# Altium PCB PCA9685_pcb.PcbDoc
Units mm, origin at the board's own origin, x right, y up, seen from the top; angles counter-clockwise.
Board outline 50.8 x 45.72 mm, 2 copper layers (Top Layer, Bottom Layer); 51 components, 24 nets, 110 pads, 19 vias.
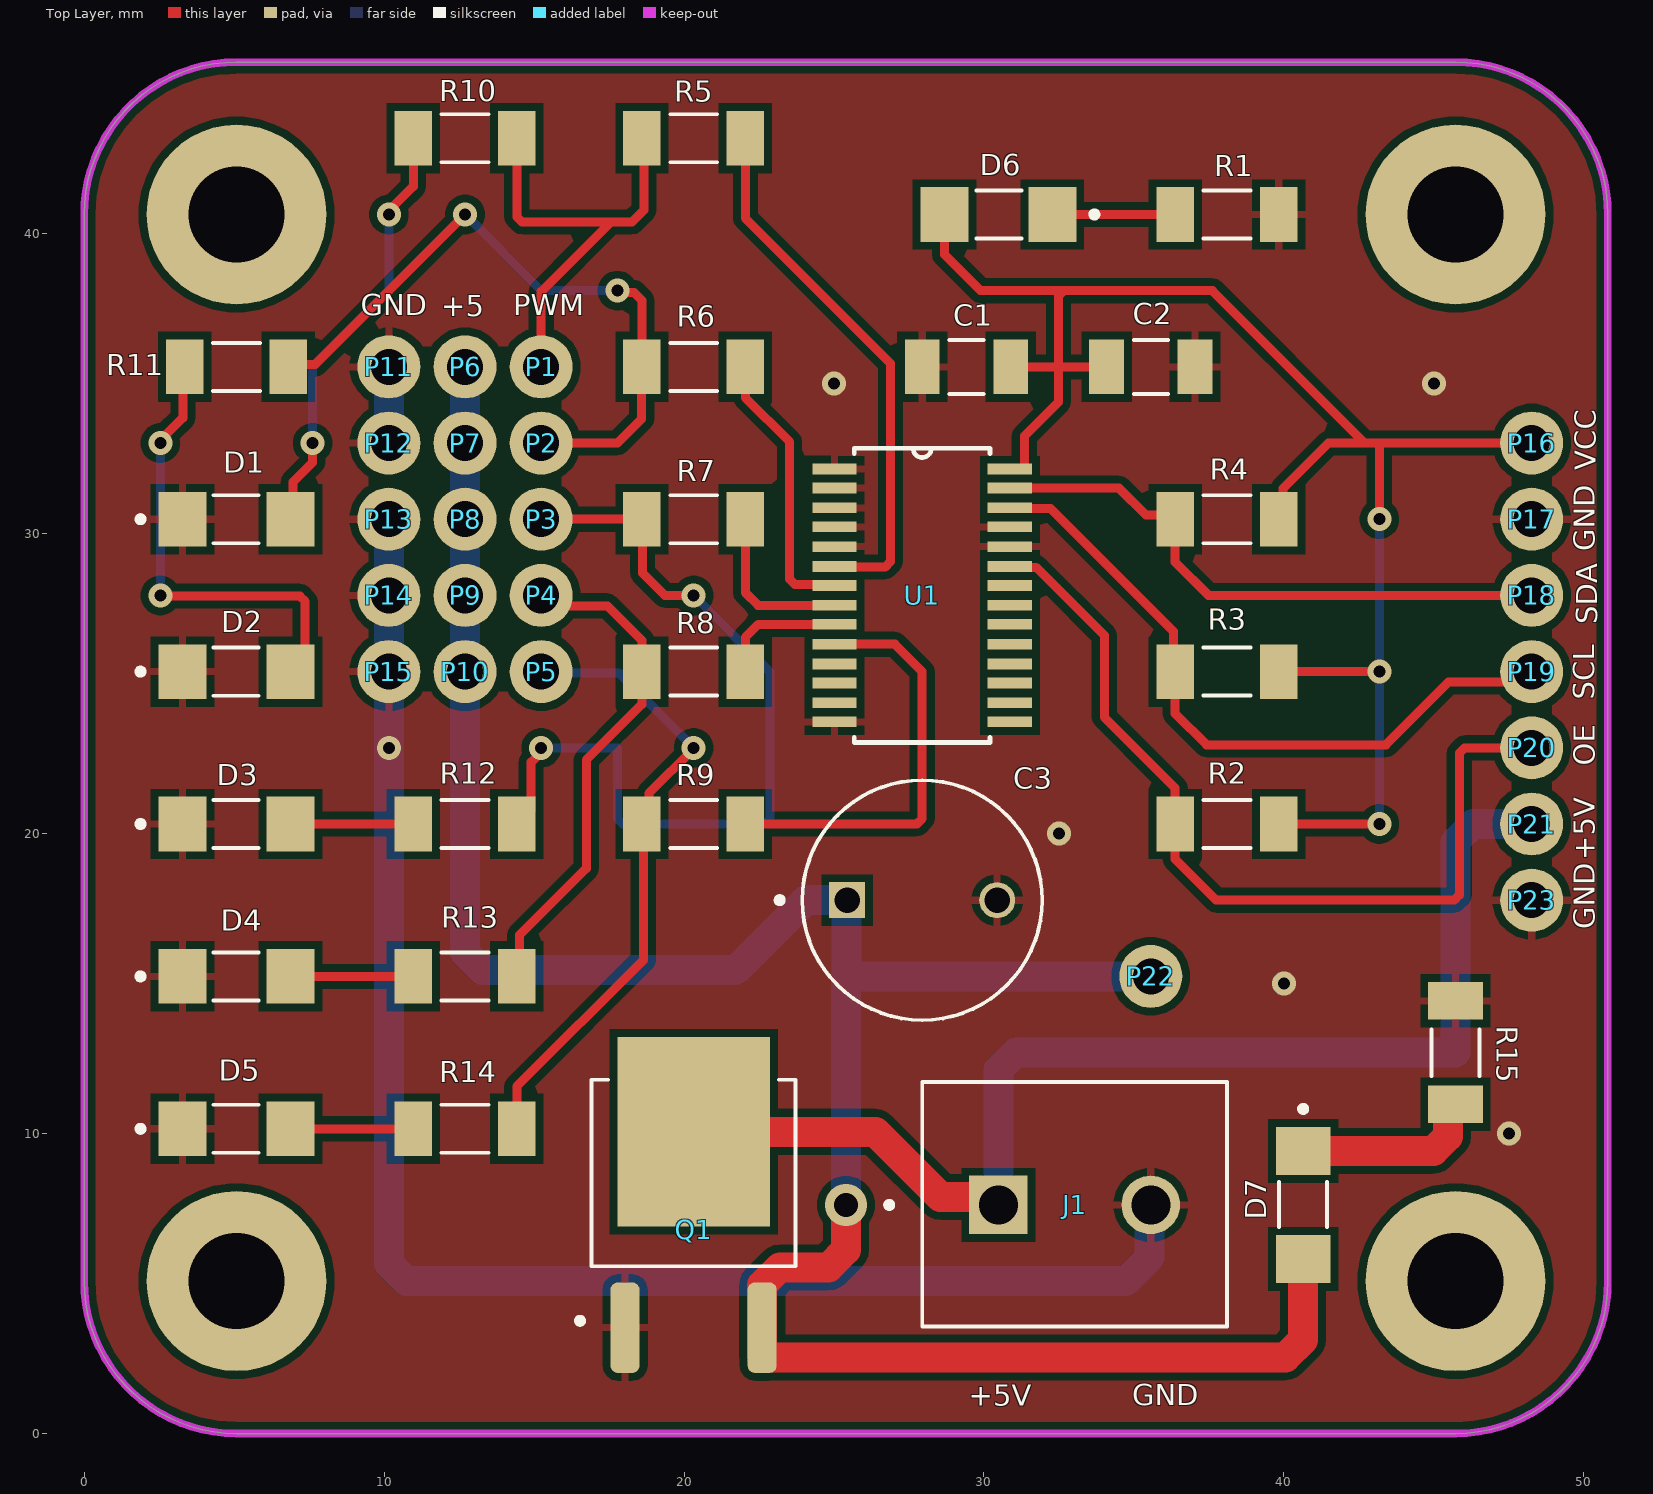
[diagram p0: Top Layer view]
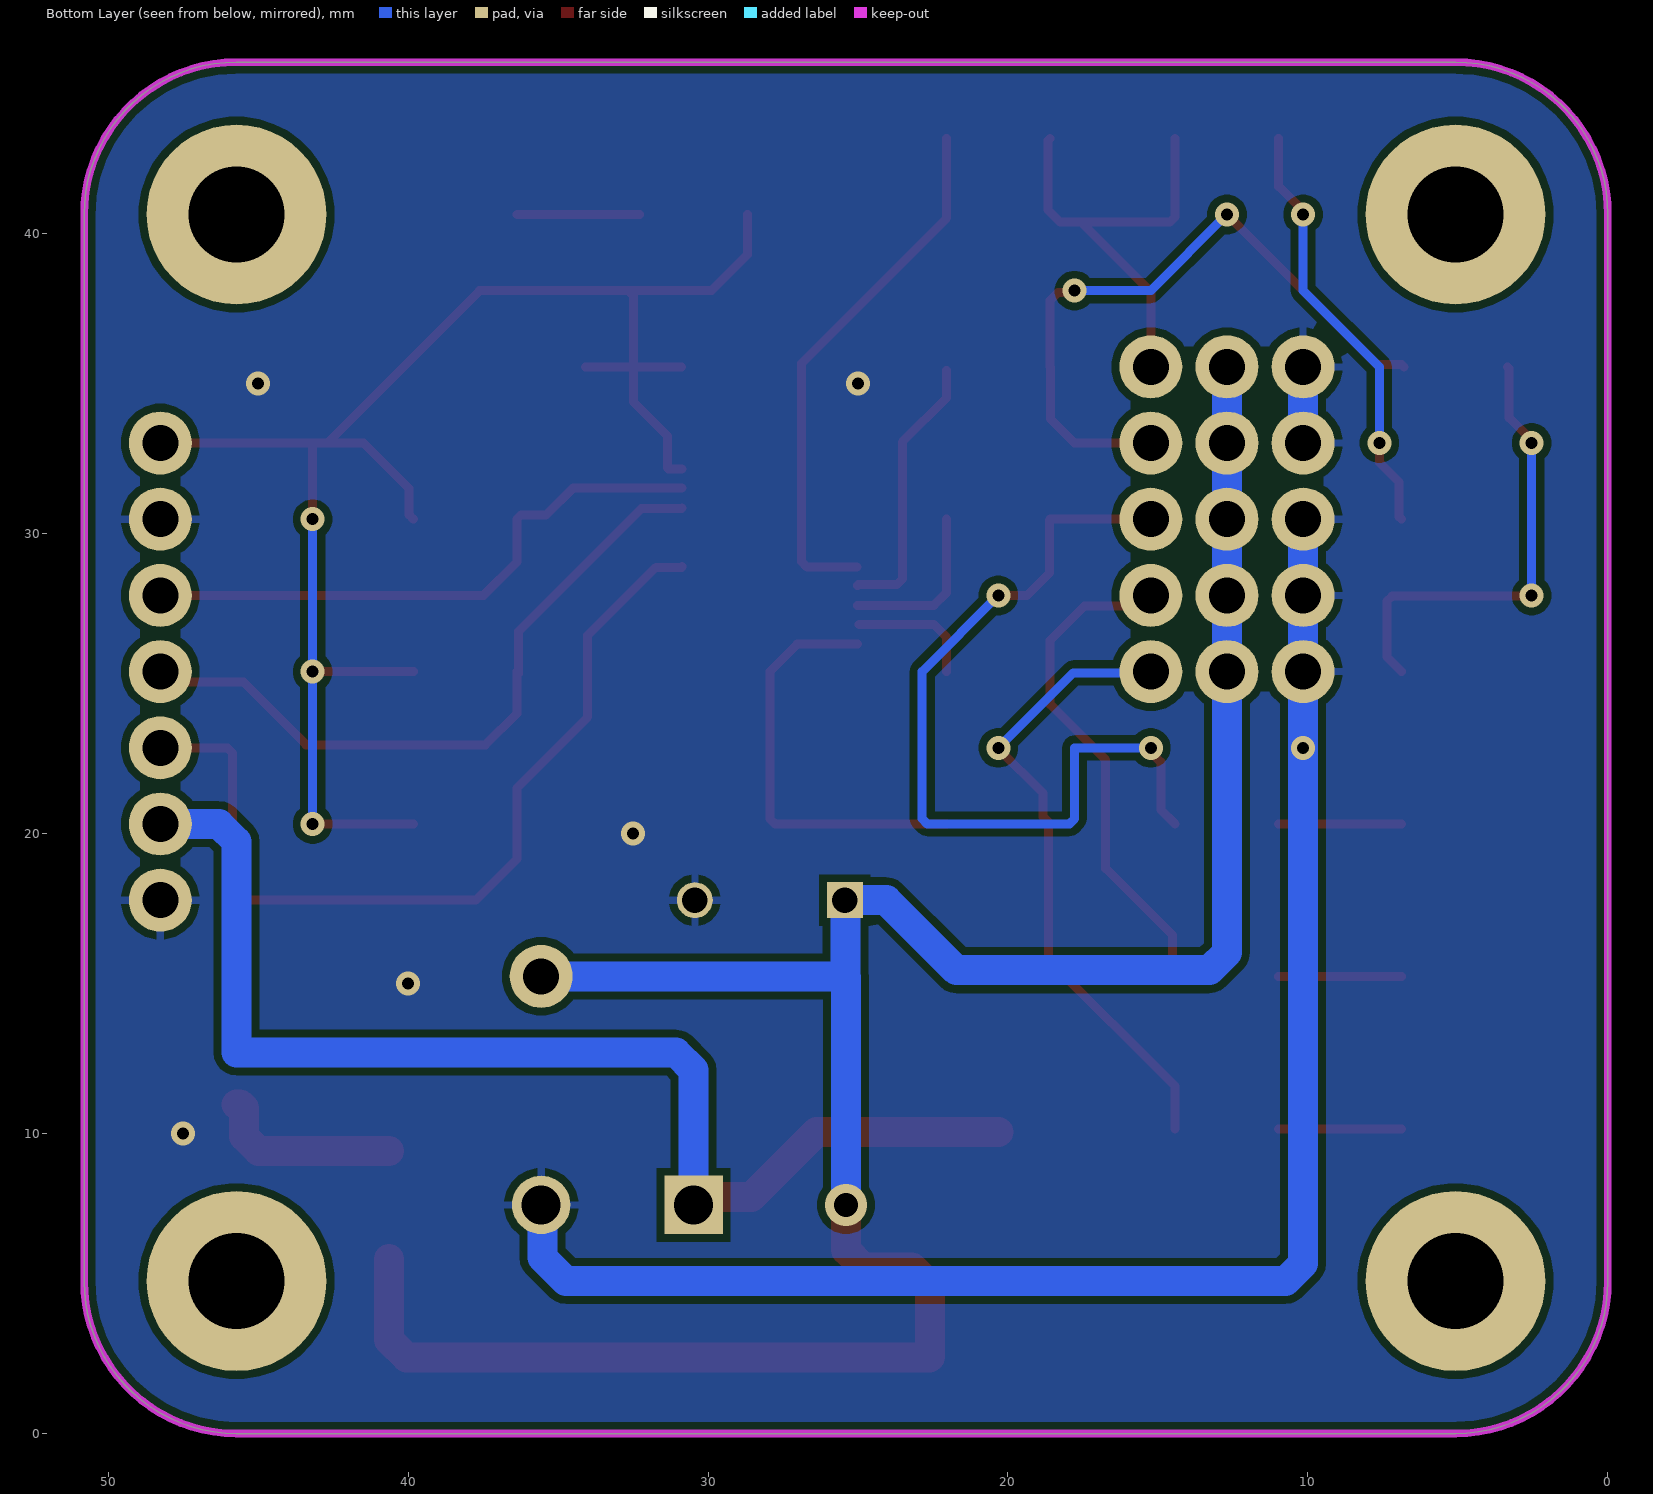
[diagram p1: Bottom Layer view, seen from below]
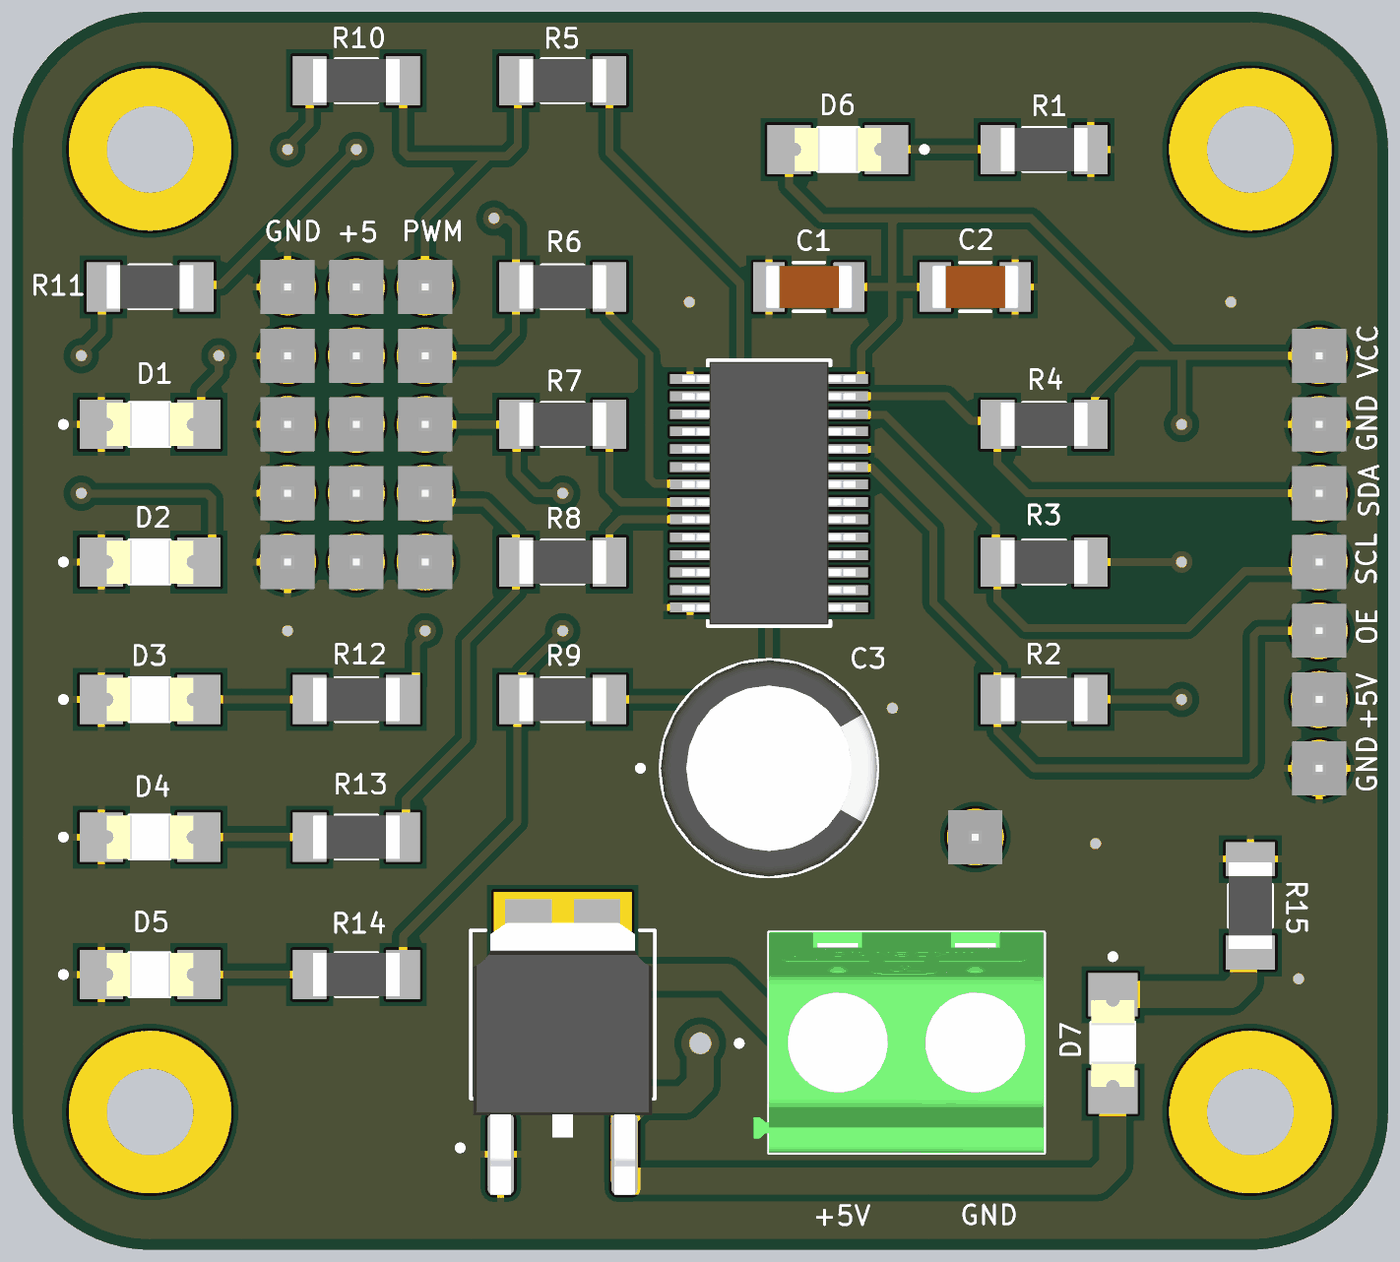
[diagram p2: 3D render of the assembled board from above, using the file's embedded part models]

## Layer stack, top to bottom
Top Solder: solder mask 0.0102, Solder Resist, Dk 3.5
Top Layer: signal copper 0.0356
Dielectric 1: dielectric 0.32, FR-4, Dk 4.8
Bottom Layer: signal copper 0.0356
Bottom Solder: solder mask 0.0102, Solder Resist, Dk 3.5

## Board outline
0,5.08 0,40.64 cw(c5.08,40.64) 5.08,45.72 45.72,45.72 cw(c45.72,40.64) 50.8,40.64 50.8,5.08 cw(c45.72,5.08) 45.72,0 5.08,0 cw(c5.08,5.08)

## Design rules (kind name [scope] priority, off if disabled: settings)
Clearance [All] p1: gap=0.254 ignorepadtopadclearanceinfootprint=FALSE
HoleSize [All] p1: absolutevalues=TRUE maxlimit=3.2 minlimit=0.025 maxpercent=80.000 minpercent=20.000
MinimumSolderMaskSliver [All] p1: minsoldermaskwidth=0.075
PolygonConnect Stitching_Direct [IsVia AND InNet('GND')] p1: connectstyle=Direct reliefconductorwidth=0.254 reliefentries=4 polygonreliefangle="90 Angle" airgapwidth=0.254
PolygonConnect PolygonConnect_1 [All] p2: connectstyle=Relief reliefconductorwidth=0.254 reliefentries=4 polygonreliefangle="90 Angle" airgapwidth=0.254
RoutingVias [All] p1: holewidth=0.711 width=1.27 viastyle="Through Hole" minholewidth=0.711 minwidth=1.27 maxholewidth=0.711 maxwidth=1.27
SilkToSolderMaskClearance [IsPad] p1: minsilkscreentomaskgap=0.05 clearancetoexposedcopper=TRUE
SolderMaskExpansion Full_Tenting [IsVia] p1: expansion=-0.05 istentingtop=TRUE
SolderMaskExpansion SolderMaskExpansion_1 [All] p2: expansion=0.102 istentingtop=FALSE
SupplyNets "Schematic Supply Nets_6" [InNet('+5_IN')] p1: voltage=0.000
SupplyNets "Schematic Supply Nets_5" [InNet('+5')] p2: voltage=0.000
SupplyNets "Schematic Supply Nets_4" [InNet('GND')] p3: voltage=0.000
SupplyNets "Schematic Supply Nets_3" [InNet('OE')] p4: voltage=0.000
SupplyNets "Schematic Supply Nets_2" [InNet('SCL')] p5: voltage=0.000
SupplyNets "Schematic Supply Nets_1" [InNet('SDA')] p6: voltage=0.000
SupplyNets "Schematic Supply Nets" [InNet('VCC')] p7: voltage=0.000
Width [All] p1: maxlimit=1 minlimit=0.254 preferedwidth=0.3 minimp=50.000000 maximp=50.000000 favimp=50.000000
27 further rules are at their usual default settings.

## Components (designator, comment, footprint, x,y, rotation, side; value= is the part's Value field where it differs from the comment)
C1 "10u" "CAPACITOR 1206" 29.415,35.56 r0 top
C2 "100n" "CAPACITOR 1206" 35.56,35.56 r180 top
C3 "1000u" "ELECTROLYTIC CAPACITOR" 27.94,17.78 r0 top
D1 "LED 1206" "LED 1206" 5.08,30.48 r0 top
D2 "LED 1206" "LED 1206" 5.08,25.4 r0 top
D3 "LED 1206" "LED 1206" 5.08,20.32 r0 top
D4 "LED 1206" "LED 1206" 5.08,15.24 r0 top
D5 "LED 1206" "LED 1206" 5.08,10.16 r0 top
D6 "LED 1206" "LED 1206" 30.48,40.64 r180 top
D7 "LED 1206" "LED 1206" 40.64,7.62 r270 top
J1 "PCB Terminal Screw" "PCB TERMINAL SCREW" 27.94,3.57 r0 top
P1 "PWM_0" PCB_PIN_1 15.24,35.56 r0 top
P2 "PWM_1" PCB_PIN_1 15.24,33.02 r0 top
P3 "PWM_2" PCB_PIN_1 15.24,30.48 r0 top
P4 "PWM_3" PCB_PIN_1 15.24,27.94 r0 top
P5 "PWM_4" PCB_PIN_1 15.24,25.4 r0 top
P6 "PIN_1" PCB_PIN_1 12.7,35.56 r0 top
P7 "PIN_1" PCB_PIN_1 12.7,33.02 r0 top
P8 "PIN_1" PCB_PIN_1 12.7,30.48 r0 top
P9 "PIN_1" PCB_PIN_1 12.7,27.94 r0 top
P10 "PIN_1" PCB_PIN_1 12.7,25.4 r0 top
P11 "PIN_1" PCB_PIN_1 10.16,35.56 r0 top
P12 "PIN_1" PCB_PIN_1 10.16,33.02 r0 top
P13 "PIN_1" PCB_PIN_1 10.16,30.48 r0 top
P14 "PIN_1" PCB_PIN_1 10.16,27.94 r0 top
P15 "PIN_1" PCB_PIN_1 10.16,25.4 r0 top
P16 "PIN_1" PCB_PIN_1 48.26,33.02 r0 top
P17 "PIN_1" PCB_PIN_1 48.26,30.48 r0 top
P18 "PIN_1" PCB_PIN_1 48.26,27.94 r0 top
P19 "PIN_1" PCB_PIN_1 48.26,25.4 r0 top
P20 "PIN_1" PCB_PIN_1 48.26,22.86 r0 top
P21 "PIN_1" PCB_PIN_1 48.26,20.32 r0 top
P22 "PIN_1" PCB_PIN_1 35.56,15.24 r0 top
P23 "PIN_1" PCB_PIN_1 48.26,17.78 r0 top
Q1 "AOD417" "TRANSISTOR AOD417" 20.32,7.62 r0 top
R1 "1K" "RESISTOR 1206" 38.1,40.64 r180 top
R2 "10K" "RESISTOR 1206" 38.1,20.32 r180 top
R3 "10K" "RESISTOR 1206" 38.1,25.4 r180 top
R4 "10K" "RESISTOR 1206" 38.1,30.48 r0 top
R5 "220" "RESISTOR 1206" 20.32,43.18 r180 top
R6 "220" "RESISTOR 1206" 20.32,35.56 r180 top
R7 "220" "RESISTOR 1206" 20.32,30.48 r180 top
R8 "220" "RESISTOR 1206" 20.32,25.4 r180 top
R9 "220" "RESISTOR 1206" 20.32,20.32 r180 top
R10 "1K" "RESISTOR 1206" 12.7,43.18 r180 top
R11 "1K" "RESISTOR 1206" 5.08,35.56 r180 top
R12 "1K" "RESISTOR 1206" 12.7,20.32 r180 top
R13 "1K" "RESISTOR 1206" 12.7,15.24 r180 top
R14 "1K" "RESISTOR 1206" 12.7,10.16 r180 top
R15 "1K" "RESISTOR 1206" 45.72,12.7 r270 top
U1 "PCA9685PW" PCA9685PW 27.94,27.94 r0 top

## Footprints (in the part's own frame and the unit in brackets; to place one, negate y for a bottom-side part, rotate by r counter-clockwise, add the part's x,y. Pads: shape width x height; smd on the part's side, far side on the other; paste and mask are expansions set on the pad)
"CAPACITOR 1206" [mm]
  rect 1.16x1.82 smd: 1(-1.475,0) 2(1.475,0)
  silkscreen extent -0.57,-0.9 0.57,0.9, body extent -1.6,-0.8 1.6,0.8, height 1.78
"ELECTROLYTIC CAPACITOR" [mm]
  round 1.2 hole 0.85: N(2.5,0)
  rect 1.2x1.2 / inner round 1.2 / far side rect 1.2x1.2 hole 0.85: P(-2.5,0)
  silkscreen extent -4.85,-4 4,4, body extent -4,-4 4,4, height 15
"LED 1206" [mm]
  rect 1.6x1.82 smd: A(1.8,0) C(-1.8,0)
  silkscreen extent -3.3,-0.8 0.73,0.8, body extent -1.6,-0.8 1.6,0.8, height 1.12
PCA9685PW [mil]
  rect 58x14 smd: 1(-115,166) 2(-115,141) 3(-115,115) 4(-115,90) 5(-115,64) 6(-115,38) 7(-115,13) 8(-115,-13) 9(-115,-38) 10(-115,-64) 11(-115,-90) 12(-115,-115) 13(-115,-141) 14(-115,-166) 15(115,-166) 16(115,-141) 17(115,-115) 18(115,-90) 19(115,-64) 20(115,-38) 21(115,-13) 22(115,13) 23(115,38) 24(115,64) 25(115,90) 26(115,115) 27(115,141) 28(115,166)
  silkscreen extent -89,-193 89,193, body extent -126,-191 126,191, height 43
"PCB TERMINAL SCREW" [mm]
  rect 1.95x1.95 / inner round 1.95 / far side rect 1.95x1.95 hole 1.3: 1(2.54,4.05)
  round 1.95 hole 1.3: 2(7.62,4.05)
  silkscreen extent -1.2,0 10.16,8.15, body extent -0.57,0 10.15,8.15, height 9.97
PCB_PIN_1 [mm]
  round 2.1 hole 1.2: 0(0,0)
  body extent -1,-1 1,1, height 4.55
"RESISTOR 1206" [mm]
  rect 1.25x1.82 smd: 1(-1.725,0) 2(1.725,0)
  silkscreen extent -0.78,-0.8 0.78,0.8, body extent -1.6,-0.8 1.6,0.8, height 0.6
"TRANSISTOR AOD417" [mm]
  rrect50% 0.97x3.02 smd: 1(-2.286,-4.09) 3(2.286,-4.09)
  rect 5.09x6.32 smd paste-4: 4(0,2.44)
  silkscreen extent -3.89,-3.96 3.4,4.18, body extent -3.3,-5.59 3.3,4.45, height 2.56

## Part data
C1 C2: library part "Capacitor 1206", Package="3216 AVX", Check_prices=https://www.snapeda.com/parts/12061C225K4T2A/AVX/view-part/?ref=eda, MF=AVX, MP=12061C225K4T2A, SnapEDA_Link=https://www.snapeda.com/parts/12061C225K4T2A/AVX/view-part/?ref=snap
C3: library part "Electrolytic capacitor", Package="RADIAL-2 Panasonic", Availability="In Stock", Check_prices=https://www.snapeda.com/parts/EEUFR1A102LB/Panasonic/view-part/?ref=eda, MF=Panasonic, MP=EEUFR1A102LB, Price=None, SnapEDA_Link=https://www.snapeda.com/parts/EEUFR1A102LB/Panasonic/view-part/?ref=snap
D1 D2 D3 D4 D5 D6 D7: Package="1206 Lite-On", Check_prices=https://www.snapeda.com/parts/LTST-C230KGKT/Lite-On/view-part/?ref=eda, MF="Lite-On Inc.", MP=LTST-C230KGKT, SnapEDA_Link=https://www.snapeda.com/parts/LTST-C230KGKT/Lite-On/view-part/?ref=snap
J1: Package=None, Check_prices=https://www.snapeda.com/parts/1729128/Phoenix+Contact/view-part/?ref=eda, MF="Phoenix Contact", MP=1729128, SnapEDA_Link=https://www.snapeda.com/parts/1729128/Phoenix+Contact/view-part/?ref=snap
P1 P2 P3 P4 P5: library part PIN_1
Q1: library part "Transistor AOD417", Package="TO-252 Alpha &amp; Omega Semiconductor", Availability=Unavailable, MF="Alpha &", MP=AOD417, Price=None, SnapEDA_Link=https://www.snapeda.com/parts/AOD417/Alpha%20%26%20Omega%20Semiconductor%20Inc./view-part/454934/?ref=snap
R1 R2 R3 R4 R5 R6 R7 R8 R9 R10 R11 R12 R13 R14 R15: library part "Resistor 1206", Package=None, Availability=Unavailable, MP=ERJU08F4703V, Price=None
U1: Package="TSSOP-28 NXP Semiconductors", Check_prices=https://www.snapeda.com/parts/PCA9685PW,118/NXP+Semiconductors/view-part/?ref=eda, MF="NXP USA", MP=PCA9685PW,118, SnapEDA_Link=https://www.snapeda.com/parts/PCA9685PW,118/NXP+Semiconductors/view-part/?ref=snap

## Free pads (board coordinates)
  round 6 hole 3.2: 1(5.08,40.64) 2(45.72,40.64) 3(5.08,5.08) 4(45.72,5.08)

## Via types
v1: diameter 0.8, hole 0.4, Top Layer to Bottom Layer, tented both sides, 18 vias
v2: diameter 1.4, hole 0.8, Top Layer to Bottom Layer, tented both sides, 1 vias

## Nets (pads, with @x,y where several pads share a name; then routed paths per layer and width w, separated by ;. In a path a pad name is that pad's centre, name@x,y a point inside that pad or via, vN(x,y) a via of type N, cw(c..) or ccw(c..) an arc to the next point about the centre after c; other vN are vias at no path point)
+5: C3.P D7.A P6.0 P7.0 P8.0 P9.0 P10.0 P22.0 Q1.3 | length 81.9
  Top Layer w1: v2(25.4,7.62) 25.4,6.121 24.814,5.535 23.192,5.535 22.606,4.949 Q1.3 22.606,2.555 22.621,2.54 40.054,2.54 40.64,3.126 D7.A
  Bottom Layer w1: P6.0 P7.0 P8.0 P9.0 P10.0 12.7,16.03 13.286,15.445 21.72,15.445 24.055,17.78 C3.P 25.42,17.76 25.42,15.24 ; v2(25.4,7.62) 25.4,15.22 25.42,15.24 ; P22.0 25.42,15.24
+5_IN: J1.1 P21.0 Q1.4 | length 41
  Top Layer w1: Q1.4 26.377,10.06 28.557,7.88 30.22,7.88 J1.1
  Bottom Layer w1: J1.1 30.48,12.114 31.066,12.7 45.72,12.7 45.72,19.734 46.306,20.32 P21.0
GND: C1.1 C2.1 C3.N D1.C D2.C D3.C D4.C D5.C J1.2 P11.0 P12.0 P13.0 P14.0 P15.0 P17.0 P23.0 Q1.1 R1.1 R15.1 U1.1 U1.2 U1.3 U1.4 U1.5 U1.14 U1.24 U1.25 | length 55
  Bottom Layer w1: P13.0 P14.0 P15.0 10.16,5.666 10.746,5.08 34.736,5.08 35.518,5.862 J1.2@35.518,7.578 ; P12.0 P11.0
  other v1: 47.5,10 40,15 32.5,20 10.16,22.86 25,35 45,35
NetD1_A: D1.A R10.2 | length 14.4
  Top Layer w0.3: D1.A 6.962,30.562 6.962,31.72 7.62,32.378 v1(7.62,33.02) ; v1(10.16,40.64) 10.16,40.763 10.975,41.578 R10.2
  Bottom Layer w0.3: v1(7.62,33.02) 7.62,35.56 10.16,38.1 v1(10.16,40.64)
NetD2_A: D2.A R11.2 | length 15.4
  Top Layer w0.3: v1(2.54,33.02) 2.54,33.106 3.297,33.862 3.297,35.502 R11.2 ; v1@2.559,27.921 7.197,27.921 7.373,27.745 7.373,25.893 D2.A
  Bottom Layer w0.3: v1(2.54,27.94) v1(2.54,33.02)
NetD3_A: D3.A R12.2 | length 4.1
  Top Layer w0.3: D3.A R12.2
NetD4_A: D4.A R13.2 | length 4.1
  Top Layer w0.3: D4.A R13.2
NetD5_A: D5.A R14.2 | length 4.1
  Top Layer w0.3: D5.A R14.2
NetD6_C: D6.C R1.2 | length 4.1
  Top Layer w0.3: D6.C R1.2
NetD7_C: D7.C R15.2 | length 6.3
  Top Layer w1: D7.C 44.98,9.42 45.47,9.91 45.47,10.85 45.595,10.975 R15.2
NetP1_0: P1.0 R5.2 R10.1 | length 15.3
  Top Layer w0.3: R10.1 14.425,40.562 14.601,40.386 17.556,40.386 ; P1.0 15.24,38.07 17.556,40.386 ; R5.2 18.661,43.114 18.661,40.783 18.264,40.386 17.556,40.386
NetP2_0: P2.0 R6.2 R11.1 | length 22.7
  Top Layer w0.3: R11.1 6.889,35.644 7.704,35.644 v1(12.7,40.64) ; P2.0 17.78,33.02 18.589,33.829 R6.2@18.589,35.554 ; v1(17.78,38.1) 17.834,38.046 18.328,38.046 18.595,37.78 R6.2
  Bottom Layer w0.3: v1(12.7,40.64) 15.24,38.1 v1(17.78,38.1)
NetP3_0: P3.0 R7.2 R12.1 | length 28.6
  Top Layer w0.3: R12.1 14.9,20.795 14.9,22.385 15.24,22.725 v1(15.24,22.86) ; P3.0 R7.2 ; R7.2@18.614,30.461 18.614,28.689 19.363,27.94 v1(20.32,27.94)
  Bottom Layer w0.3: v1(15.24,22.86) 17.78,22.86 17.78,20.496 17.956,20.32 22.684,20.32 22.86,20.496 22.86,25.4 v1(20.32,27.94)
NetP4_0: P4.0 R8.2 R13.1 | length 16.9
  Top Layer w0.3: R13.1 14.523,15.338 14.523,16.62 16.744,18.841 16.744,22.46 18.595,24.311 18.595,26.442 17.441,27.596 15.584,27.596 P4.0
NetP5_0: P5.0 R9.2 R14.1 | length 21.3
  Top Layer w0.3: R14.1 14.425,11.569 18.641,15.785 18.641,20.274 R9.2 18.831,20.556 18.831,21.344 20.32,22.833 v1(20.32,22.86)
  Bottom Layer w0.3: P5.0 15.281,25.359 17.821,25.359 v1(20.32,22.86)
NetR5_1: R5.1 U1.6 | length 18
  Top Layer w0.3: R5.1 22.045,40.515 26.883,35.677 26.883,29.063 26.707,28.887 U1.6@25.037,28.887
NetR6_1: R6.1 U1.7 | length 9.1
  Top Layer w0.3: R6.1@22.045,35.435 22.047,35.433 22.047,34.536 23.52,33.063 23.52,28.485 23.707,28.298 24.991,28.298 U1.7
NetR7_1: R7.1 U1.8 | length 5.6
  Top Layer w0.3: R7.1 22.045,28.038 22.473,27.61 U1.8
NetR8_1: R8.1 U1.9 | length 4.2
  Top Layer w0.3: R8.1 22.045,26.544 22.476,26.975 U1.9@24.963,26.975
NetR9_1: R9.1 U1.10 | length 14.2
  Top Layer w0.3: R9.1 27.764,20.32 27.94,20.496 27.94,25.4 27.026,26.314 U1.10
OE: P20.0 R2.2 U1.23 | length 29.9
  Top Layer w0.3: U1.23 30.889,28.877 31.74,28.877 34.012,26.605 34.012,23.88 36.375,21.517 R2.2 36.375,19.147 37.742,17.78 45.671,17.78 45.847,17.956 45.847,22.684 46.022,22.86 P20.0
SCL: P19.0 R3.2 U1.26 | length 23.3
  Top Layer w0.3: U1.26 30.889,30.833 32.221,30.833 36.316,26.738 R3.2@36.316,25.334 ; R3.2 36.375,24.001 37.419,22.957 43.395,22.957 45.494,25.056 47.916,25.056 P19.0
SDA: P18.0 R4.1 U1.27 | length 19.7
  Top Layer w0.3: U1.27 34.499,31.521 35.403,30.618 36.237,30.618 R4.1 36.375,29.05 37.485,27.94 P18.0
VCC: C1.2 C2.2 D6.A P16.0 R2.1 R3.1 R4.2 U1.28 | length 57.5
  Top Layer w0.3: D6.A 28.68,39.307 29.887,38.1 32.662,38.1 ; U1.28 31.315,32.156 31.343,32.184 31.343,33.248 32.487,34.392 32.487,35.56 ; C1.2 32.487,35.56 ; C2.2 32.487,35.56 ; R2.1 v1(43.18,20.32) ; R3.1 v1(43.18,25.4) ; R4.2 39.968,30.623 39.968,31.504 41.484,33.02 42.698,33.02 ; v1(43.18,30.48) 43.18,33.02 ; P16.0 43.18,33.02 ; 32.487,35.56 32.487,37.924 32.662,38.1 ; 32.662,38.1 37.618,38.1 42.698,33.02 ; 42.698,33.02 43.18,33.02
  Bottom Layer w0.3: v1(43.18,20.32) v1(43.18,25.4) v1(43.18,30.48)
pads on no net: U1.11 U1.12 U1.13 U1.15 U1.16 U1.17 U1.18 U1.19 U1.20 U1.21 U1.22

## Polygon pours and split planes (outlines as drawn)
GND on Top Layer "NONET_L-01_P-001" (solid, remove dead copper, pour order 0): 0,0 0,45.72 50.8,45.72 50.8,0
GND on Bottom Layer "NONET_L-01_P-001" (solid, remove dead copper, pour order 1): 0,0 0,45.72 50.8,45.72 50.8,0

## Keep-outs
Keep-Out Layer:
  the board outline again, w0.254

## Silkscreen, mask and mechanical layers (free items; w line width, h text height)
Top Overlay:
  text "GND" at 9.228,37.285 h0.7
  text "PWM" at 14.3,37.285 h0.7
  text "+5" at 11.907,37.249 h0.7
  text "VCC" at 50.391,32.118 h0.7 r90
  text "GND" at 50.367,29.406 h0.7 r90
  text "SDA" at 50.437,26.973 h0.7 r90
  text "SCL" at 50.344,24.47 h0.7 r90
  text "OE" at 50.367,22.27 h0.7 r90
  text "+5V" at 50.36,19.103 h0.7 r90
  text "GND" at 50.359,16.804 h0.7 r90
  text "GND" at 34.935,0.946 h0.7
  text "+5V" at 29.49,0.919 h0.7
Mechanical 1:
  lines w0.254: 5.08,45.72 ccw(c5.08,40.64) 0,40.64 0,5.08 ccw(c5.08,5.08) 5.08,0 45.72,0 ccw(c45.72,5.08) 50.8,5.08 50.8,40.64 ccw(c45.72,40.64) 45.72,45.72 5.08,45.72 ; 5.08,45.72 5.08,45.72 ; 5.08,45.72 5.08,45.72